# EAGLE board Aux Power Board V1.1 (EAGLE 9.2.2)
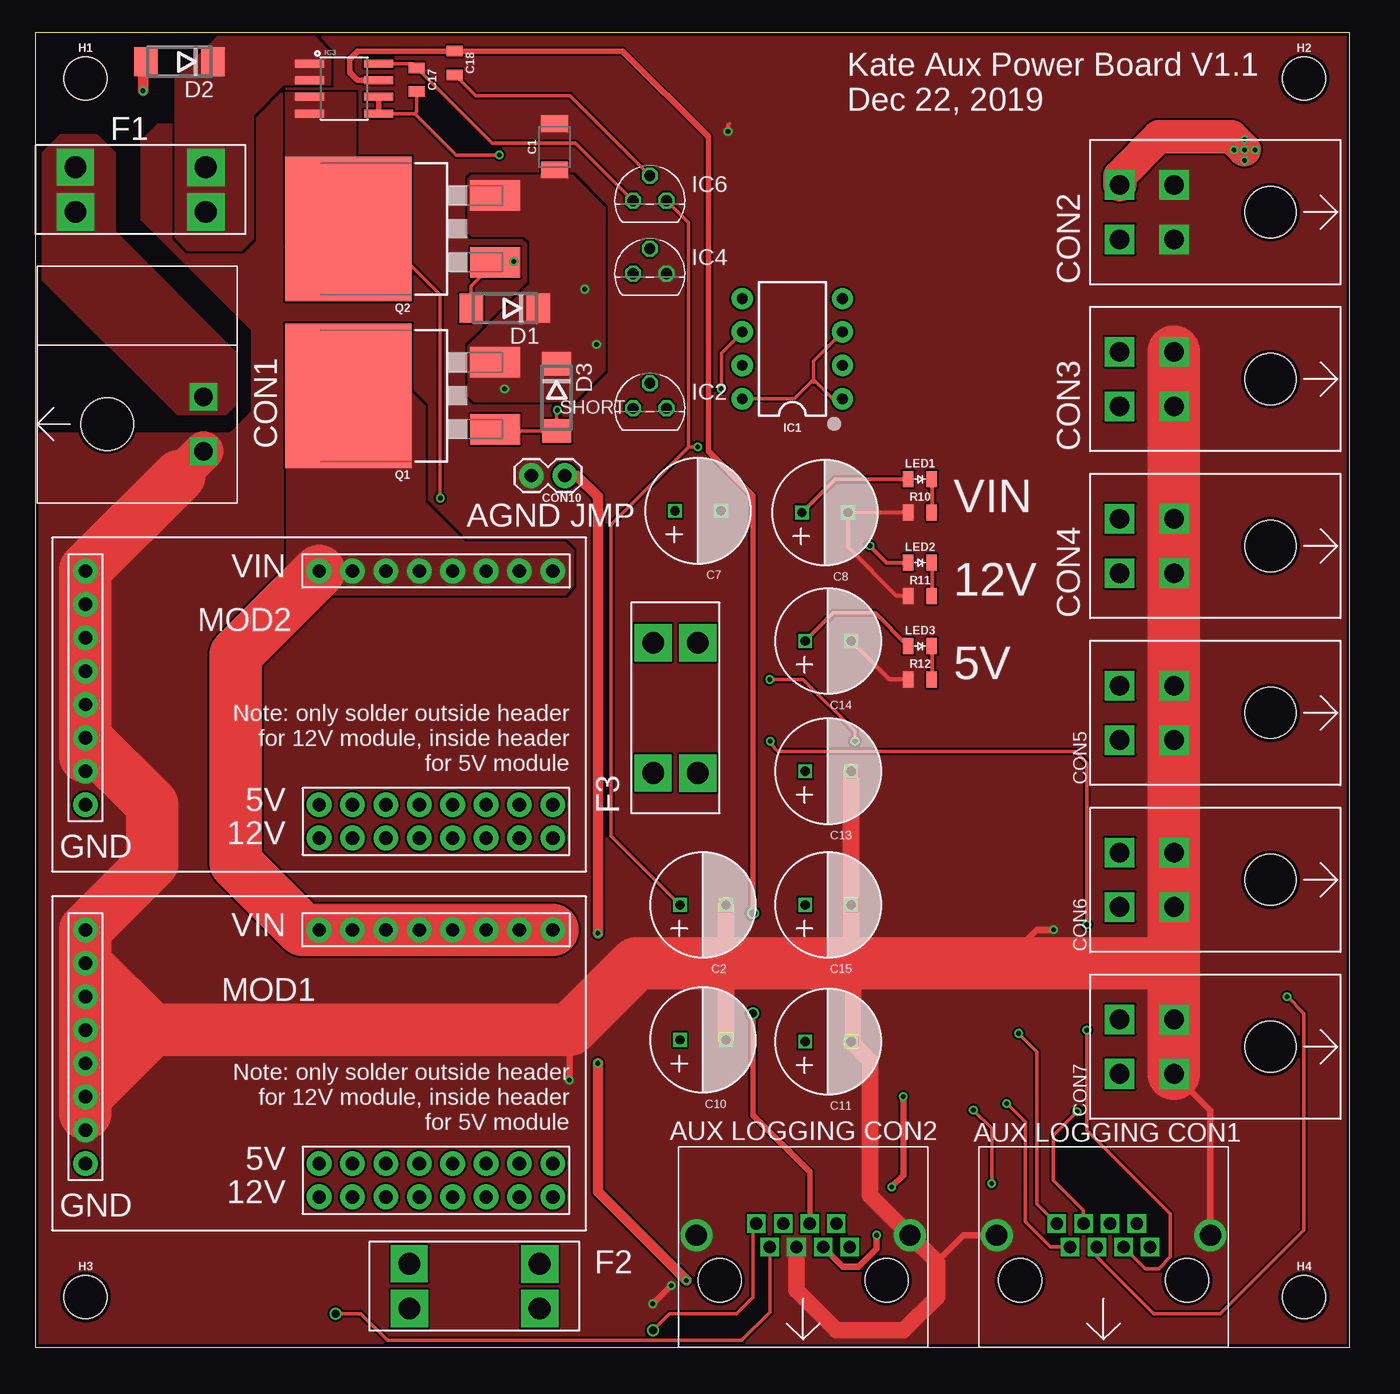
[diagram p0: board, top side]
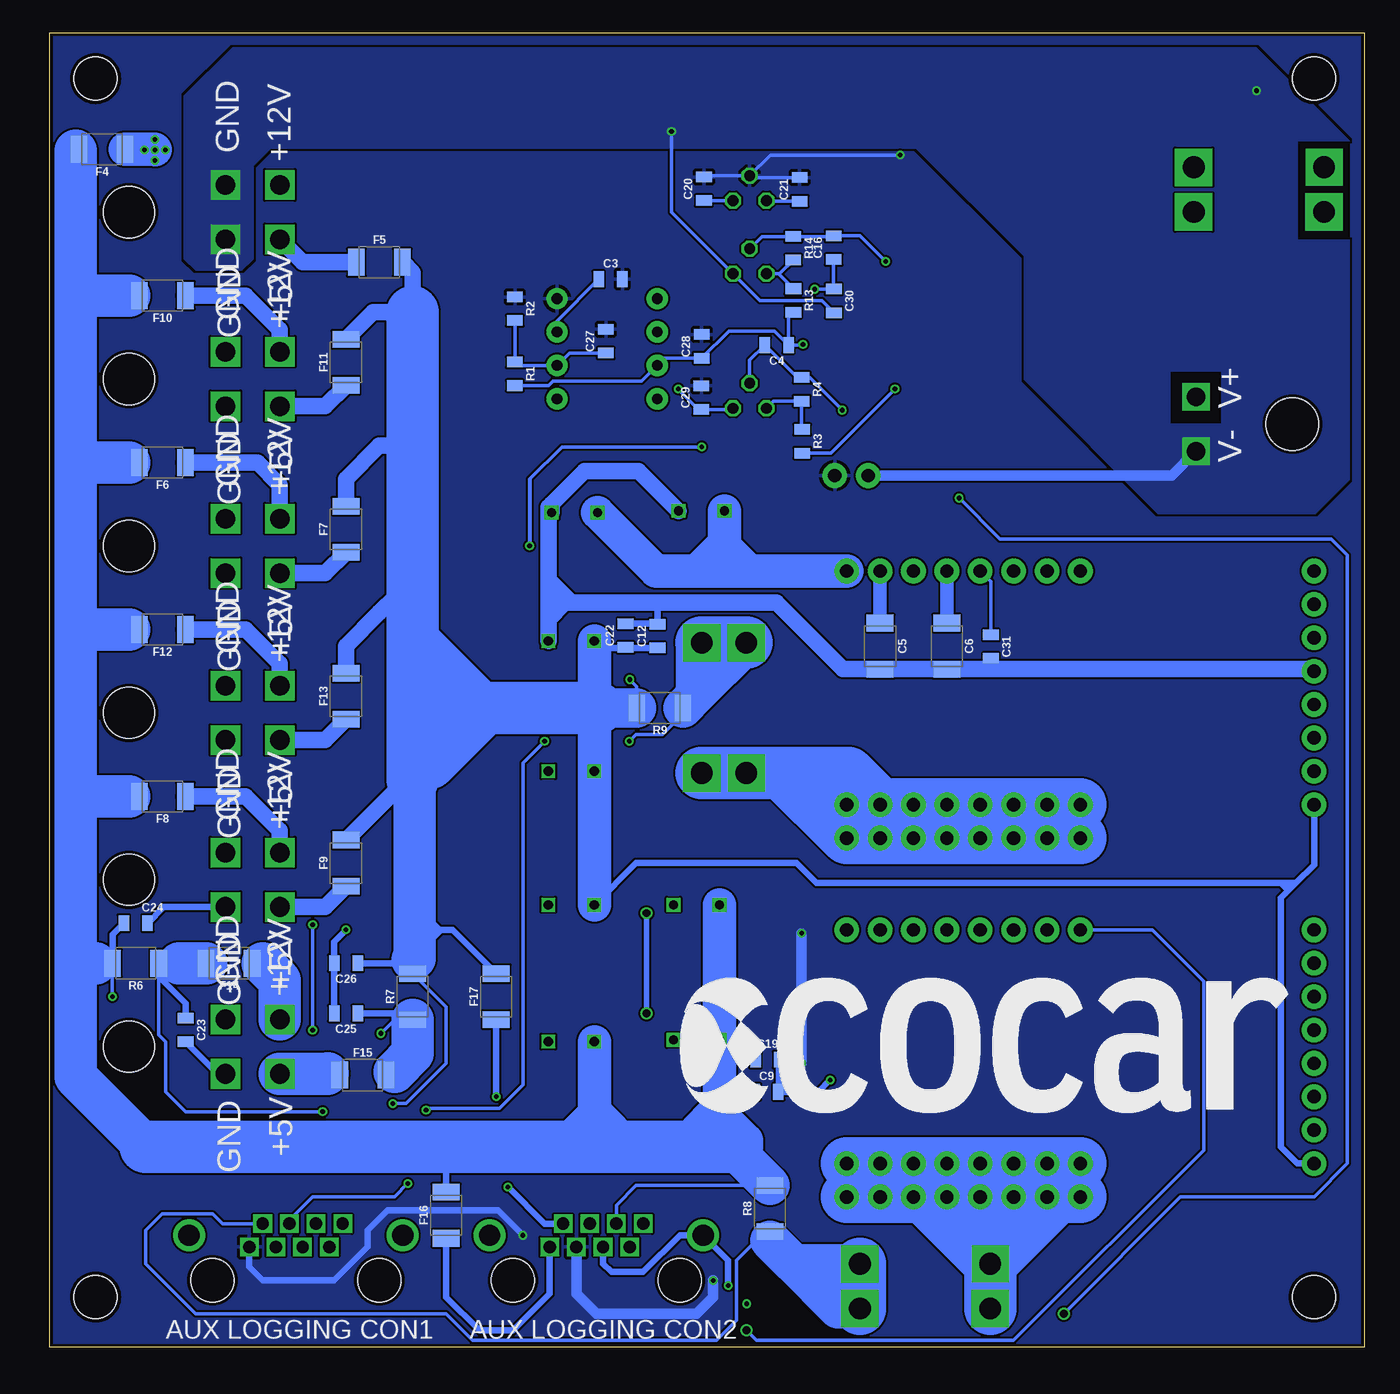
[diagram p1: board, bottom side, seen from below]

Size 100 x 100 mm. Coordinates in mm from the lower left corner, seen from the top.
Outline: 0,0 100,0 100,100 0,100 0,0
Copper layers (1*16): Top 0.035mm / dielectric 1.5mm / Bottom 0.035mm
Design rules "JLCPCB2Layer": minimum track width 6mil, minimum drill 10mil, track to track 6mil, track to pad 6mil, pad to pad 6mil, via to via 6mil, smd to smd 0mil, copper to edge 10mil, drill to drill 10mil, minimum pad ring 6mil, minimum via ring 6mil, stop-mask expansion 2mil, vias tented up to drill 100mil, thermal gap 10mil
bRestrict: area 10.9,70.3 to 14.7,74.2; area 1.1,84.3 to 5,91.7

## Footprints (pad centres in the part's own frame; a part is rotated, then mirrored left to right if it is on the bottom)
1210 = smd 1.27 x 2.06: 1 -1.755,0; 2 1.755,0
CAPACITOR_100UF_50V = drill 0.7 square: + 1.75,0; - -1.75,0
0805 = smd 0.8 x 1.2: 1 -0.9,0; 2 0.9,0
TE_2-PIN = drill 1.4 square: 1 -2.07,12.67; 2 2.07,12.67 | hole 4: 0,5.33
TE_4-PIN = drill 1.5 square: 1 2.07,11.48; 2 -2.07,11.48; 3 2.07,7.34; 4 -2.07,7.34 | hole 3.91: 0,0
RJ45 = drill 0.94 square: 1 9.9,2.54; 2 8.88,4.32; 3 7.87,2.54; 4 6.85,4.32; 5 5.84,2.54; 6 4.82,4.32; 7 3.81,2.54; 8 2.79,4.32 | drill 1.62: 9 -1.78,3.43; 10 14.48,3.43 | hole 3.3: 0,0; 12.7,0
1X02 = drill 1.016 pad 1.88: 1 0,0; 2 2.54,0
DO214AA = smd 1.8 x 2.2: A 2.55,0; C -2.55,0
FUSEHOLDER_VERTICAL = drill 1.65 pad 2.85 square: 1 3.045,1.665; 3 12.965,1.665; 4 12.965,5.065 | drill 1.65 pad 2.8 square: 2 3.045,5.065
STAND-OFF = hole 3.302: 0,0
DIP08 = drill 0.813 pad 1.626: 1 -3.81,-3.81; 2 -1.27,-3.81; 3 1.27,-3.81; 4 3.81,-3.81; 5 3.81,3.81; 6 1.27,3.81; 7 -1.27,3.81; 8 -3.81,3.81
TO92 = drill 0.813 octagon: 1 1.27,0; 2 0,1.905; 3 -1.27,0
SOIC8 = smd 0.61 x 2.21: 1 -1.905,-2.616; 2 -0.635,-2.616; 3 0.635,-2.616; 4 1.905,-2.616; 5 1.905,2.616; 6 0.635,2.616; 7 -0.635,2.616; 8 -1.905,2.616
0805_LED = smd 0.8 x 1.2: 1 -0.9,0; 2 0.9,0
5/12V_MODULE = drill 1.016 pad 1.88: P$1 2.54,2.54; P$2 5.08,2.54; P$3 7.62,2.54; P$4 10.16,2.54; P$5 12.7,2.54; P$6 15.24,2.54; P$7 17.78,2.54; P$8 20.32,2.54; P$9 2.54,20.32; P$10 5.08,20.32; P$11 7.62,20.32; P$12 10.16,20.32; P$13 12.7,20.32; P$14 15.24,20.32; P$15 17.78,20.32; P$16 20.32,20.32; P$17 2.54,22.86; P$18 5.08,22.86; P$19 7.62,22.86; P$20 10.16,22.86; P$21 12.7,22.86; P$22 15.24,22.86; P$23 17.78,22.86; P$24 20.32,22.86; P$25 38.1,2.54; P$26 38.1,5.08; P$27 38.1,7.62; P$28 38.1,10.16; P$29 38.1,12.7; P$30 38.1,15.24; P$31 38.1,17.78; P$32 38.1,20.32
TO-263/D2PAK = smd 2.32 x 3.81: 1 -2.54,-7.045; 3 2.54,-7.045 | smd 11 x 9.65: 2 0,4.125

## Placement (x,y rotation side)
C1  22uF  [1210]  39.5,91.33 90 top
C2  100uF  [CAPACITOR_100UF_50V]  50.8,33.66 180 top
C3  1uF  [0805]  57.34,81.25 0 bottom
C4  1uF  [0805]  44.7,76.24 180 bottom
C5  22uF  [1210]  36.83,53.34 270 bottom
C6  22uF  [1210]  31.75,53.34 270 bottom
C7  100uF  [CAPACITOR_100UF_50V]  50.42,63.63 180 top
C8  100uF  [CAPACITOR_100UF_50V]  60.07,63.5 180 top
C9  22uF  [0805]  45.47,19.43 0 bottom
C10  100uF  [CAPACITOR_100UF_50V]  50.8,23.37 180 top
C11  100uF  [CAPACITOR_100UF_50V]  60.33,23.24 180 top
C12  22uF  [0805]  53.76,54.1 90 bottom
C13  100uF  [CAPACITOR_100UF_50V]  60.33,43.81 180 top
C14  100uF  [CAPACITOR_100UF_50V]  60.33,53.72 180 top
C15  100uF  [CAPACITOR_100UF_50V]  60.33,33.66 180 top
C16  1uF  [0805]  40.36,83.65 90 bottom
C17  0.1uF  [0805]  29.01,96.44 270 top
C18  1nF  [0805]  31.89,97.71 270 top
C19  0.1uF  [0805]  45.41,21.88 0 bottom
C20  0.1uF  [0805]  50.24,88.13 90 bottom
C21  1uF  [0805]  42.95,88.09 90 bottom
C22  0.1uF  [0805]  56.19,54.15 90 bottom
C23  0.1uF  [0805]  89.66,24.13 270 bottom
C24  0.1uF  [0805]  93.47,32.26 0 bottom
C25  0.1uF  [0805]  77.47,25.4 180 bottom
C26  0.1uF  [0805]  77.47,29.21 180 bottom
C27  0.1uF  [0805]  57.7,76.54 90 bottom
C28  0.1uF  [0805]  50.4,76.14 90 bottom
C29  0.1uF  [0805]  50.44,72.25 90 bottom
C30  0.1uF  [0805]  40.35,79.61 270 bottom
C31  0.1uF  [0805]  28.4,53.3 270 bottom
CON1  TE_2-PIN  [TE_2-PIN]  0.13,70.23 270 top
CON2  TE_4-PIN  [TE_4-PIN]  93.98,86.36 90 top
CON3  TE_4-PIN  [TE_4-PIN]  93.98,73.66 90 top
CON4  TE_4-PIN  [TE_4-PIN]  93.98,60.96 90 top
CON5  TE_4-PIN  [TE_4-PIN]  93.98,48.26 90 top
CON6  TE_4-PIN  [TE_4-PIN]  93.98,35.56 90 top
CON7  TE_4-PIN  [TE_4-PIN]  93.98,22.86 90 top
CON8  RJ45  [RJ45]  74.93,5.08 0 top
CON9  RJ45  [RJ45]  52.07,5.08 0 top
CON10  1X02  [1X02]  40.28,66.32 180 top
D1  [DO214AA]  35.72,79.04 180 top
D2  [DO214AA]  10.96,97.8 180 top
D3  [DO214AA]  39.66,72.26 270 top
F1  7.5A  [FUSEHOLDER_VERTICAL]  0,84.71 0 top
F2  7.5A  [FUSEHOLDER_VERTICAL]  25.4,1.27 0 top
F3  7.5A  [FUSEHOLDER_VERTICAL]  52.07,40.64 90 top
F4  [1210]  96.04,91.14 180 bottom
F5  [1210]  74.93,82.55 0 bottom
F6  [1210]  91.44,67.31 180 bottom
F7  [1210]  77.47,62.23 90 bottom
F8  [1210]  91.44,41.91 180 bottom
F9  [1210]  77.47,36.83 90 bottom
F10  [1210]  91.44,80.01 180 bottom
F11  [1210]  77.47,74.93 90 bottom
F12  [1210]  91.44,54.61 180 bottom
F13  [1210]  77.47,49.53 90 bottom
F14  [1210]  86.36,29.21 180 bottom
F15  [1210]  76.2,20.7 0 bottom
F16  [1210]  69.85,10.03 90 bottom
F17  [1210]  66.04,26.67 90 bottom
H1  STAND-OFF  [STAND-OFF]  3.81,96.52 0 top
H2  STAND-OFF  [STAND-OFF]  96.52,96.52 0 top
H3  STAND-OFF  [STAND-OFF]  3.81,3.81 0 top
H4  STAND-OFF  [STAND-OFF]  96.52,3.81 0 top
IC1  OP-AMP_LM10  [DIP08]  57.6,75.97 90 top
IC2  LINEAR-REGULATOR_LM337L  [TO92]  46.75,71.44 0 top
IC3  CURRENT-SENSOR_ACS723  [SOIC8]  23.5,95.76 270 top
IC4  LINEAR-REGULATOR_LM337L  [TO92]  46.75,81.68 0 top
IC6  LINEAR-REGULATOR_LP2950  [TO92]  46.75,87.23 0 top
LED1  [0805_LED]  67.31,66.04 0 top
LED2  [0805_LED]  67.31,59.69 0 top
LED3  [0805_LED]  67.31,53.34 0 top
MOD1  12V_MODULE  [5/12V_MODULE]  41.91,34.29 180 top
MOD2  5V_MODULE  [5/12V_MODULE]  41.91,61.59 180 top
Q1  [TO-263/D2PAK]  27.94,72.39 90 top
Q2  [TO-263/D2PAK]  27.94,85.09 90 top
R1  100k  [0805]  64.62,74.06 270 bottom
R2  1.3k  [0805]  64.62,79.01 270 bottom
R3  1.6k  [0805]  42.76,68.92 270 bottom
R4  240  [0805]  42.8,72.87 270 bottom
R6  [1210]  93.47,29.21 180 bottom
R7  [1210]  72.39,26.67 90 bottom
R8  [1210]  45.21,10.54 90 bottom
R9  [1210]  53.59,48.64 180 bottom
R10  [0805]  67.31,63.5 0 top
R11  [0805]  67.31,57.15 0 top
R12  [0805]  67.31,50.8 0 top
R13  1.6k  [0805]  43.43,79.64 270 bottom
R14  240  [0805]  43.44,83.61 270 bottom
U$7  ECOCAR_LOGO  [ECOCAR_LOGO_2018]  52.07,17.78 0 bottom

## Library data of the parts
C1-C31 R1-R4 R6-R14 = EcoCar-Passives
CON1-CON9 = EcoCar-Connectors
CON10 = EcoCar-Connectors-2.54mm
D1-D3 F1-F17 = EcoCar-Fuses-Protection
H1-H4 U$7 = EcoCar-Miscellaneous
IC1-IC4 IC6 = EcoCar-Integrated-Circuits
LED1-LED3 Q1 Q2 = EcoCar-Discrete-Semiconductors
MOD1 MOD2 = EcoCar-Modules

## Nets
5V: C12.1 C13.+ C14.+ C15.+ C22.1 C26.1 CON8.4 CON8.7 F5.2 F7.2 F9.2 F11.2 F13.2 F17.2 LED3.1 MOD1.P$32 MOD2.P$32 R7.2 R9.2
5V': CON8.3 F3.3 F3.4 R9.1
5V_ANALOG: C17.1 C21.1 IC3.8 IC6.3
5V_FC: C25.1 CON8.8 F15.2 R7.1
12V: C2.+ C9.1 C10.+ C11.+ C19.1 C20.1 C24.1 CON8.5 CON9.6 F4.2 F6.2 F8.2 F10.2 F12.2 F16.2 IC6.1 LED2.1 R6.2 R8.2
12V': CON8.2 F2.3 F2.4 R8.1
12V_FC: C23.1 CON8.6 F14.2 R6.1
AGND: C3.2 C17.2 C18.2 C20.2 C21.2 C27.2 C28.2 C29.2 CON8.1 CON9.3 CON10.1 IC1.4 IC3.5 IC3.6 IC6.2 R2.1
BATTERY_IN: CON9.7 IC3.3 IC3.4 Q2.2
GND: C1.2 C2.- C5.2 C6.2 C7.- C8.- C9.2 C10.- C11.- C12.2 C13.- C14.- C15.- C19.2 C22.2 C23.2 C24.2 C25.2 C26.2 C30.2 C31.2 CON1.2 CON2.3 CON2.4 CON3.3 CON3.4 CON4.3 CON4.4 CON5.3 CON5.4 CON6.3 CON6.4 CON7.3 CON7.4 CON8.9 CON8.10 CON9.5 CON9.9 CON9.10 CON10.2 D2.A IC4.1 MOD1.P$25 MOD1.P$26 MOD1.P$27 MOD1.P$28 MOD1.P$29 MOD1.P$30 MOD1.P$31 MOD2.P$25 MOD2.P$26 MOD2.P$27 MOD2.P$28 MOD2.P$29 MOD2.P$30 MOD2.P$31 R10.1 R11.1 R12.1
HALL_CURRENT: C18.1 CON9.4 IC3.7
N$1: CON2.1 F4.1
N$2: CON1.1 F1.1 F1.2
N$4: LED1.2 R10.2
N$5: C3.1 IC1.1 IC1.3 IC1.8
N$6: C27.1 IC1.2 R1.1 R2.2
N$7: F2.1 F2.2 MOD1.P$9 MOD1.P$10 MOD1.P$11 MOD1.P$12 MOD1.P$13 MOD1.P$14 MOD1.P$15 MOD1.P$16 MOD1.P$17 MOD1.P$18 MOD1.P$19 MOD1.P$20 MOD1.P$21 MOD1.P$22 MOD1.P$23 MOD1.P$24
N$8: C4.2 D3.A IC2.2 Q1.1 R4.1
N$9: IC2.3 R3.1 R4.2
N$10: CON2.2 F5.1
N$11: F3.1 F3.2 MOD2.P$9 MOD2.P$10 MOD2.P$11 MOD2.P$12 MOD2.P$13 MOD2.P$14 MOD2.P$15 MOD2.P$16 MOD2.P$17 MOD2.P$18 MOD2.P$19 MOD2.P$20 MOD2.P$21 MOD2.P$22 MOD2.P$23 MOD2.P$24
N$12: CON9.1 F16.1
N$13: LED3.2 R12.2
N$14: CON9.2 F17.1
N$15: CON3.2 F11.1
N$16: CON3.1 F10.1
N$17: LED2.2 R11.2
N$18: IC4.3 R13.1 R14.2
N$19: CON5.2 F13.1
N$20: CON5.1 F12.1
N$21: C16.2 D1.A IC4.2 Q2.1 R14.1
N$22: D2.C F1.3 F1.4 IC3.1 IC3.2
N$23: CON4.2 F7.1
N$24: CON4.1 F6.1
N$27: CON6.2 F9.1
N$28: CON6.1 F8.1
N$31: CON7.2 F15.1
N$32: CON7.1 F14.1
REGULATOR_ON: C29.1 IC1.6 IC2.1
REVERSE_POLARITY_PROT_OUT: C1.1 C4.1 C16.1 C28.1 C30.1 D1.C D3.C IC1.7 Q1.3 Q2.3 R1.2 R3.2 R13.2
VCC: C5.1 C6.1 C7.+ C8.+ C31.1 CON9.8 LED1.1 MOD1.P$1 MOD1.P$2 MOD1.P$3 MOD1.P$4 MOD1.P$5 MOD1.P$6 MOD1.P$7 MOD1.P$8 MOD2.P$1 MOD2.P$2 MOD2.P$3 MOD2.P$4 MOD2.P$5 MOD2.P$6 MOD2.P$7 MOD2.P$8 Q1.2

## Tracks (layer width: path | path; a pad name or v marks a point on that pad's centre or on a via)
5V  (via drill 0.35)
  Top 0.254: v73.91,18.54 75.31,17.14 75.31,9.53 77.22,7.62 CON8.7 | v55.88,50.8 58.42,50.8 62.36,46.86 v62.36,46.1 | v71.37,18.03 72.77,16.64 v72.77,12.45
  Top 0.305: C14.+ 60.73,55.88 63.87,55.88 LED3.1
  Bottom 0.254: 55.88,48.11 R9.2 55.35,50.27 v55.88,50.8 | R7.2 69.85,25.89 69.85,21.59 72.9,18.54 v73.91,18.54 | v62.36,46.1 64.01,44.45 64.01,19.94 65.79,18.16 71.25,18.16 v71.37,18.03 | v72.77,12.45 73.79,11.43 80.01,11.43 81.78,9.66 CON8.4 | C22.1 58.1,53.25 C14.+
  Bottom 0.508: 66.53,28.43 F17.2 69.36,31.75 70.36,31.75 | 70.36,31.75 71.12,31.75 71.12,33.02 | 72.26,33.02 71.63,33.02 70.36,31.75 | 70.36,31.75 70.36,31.62 70.87,31.11 | C26.1 73.17,29.21 R7.2 | C15.+ 55.4,36.83 43.18,36.83 41.66,35.31 6.35,35.31 | 6.35,35.31 6.1,35.31 | 6.1,35.31 5.21,35.31 | 5.21,35.31 3.81,36.7 MOD2.P$32 | 5.21,35.31 5.65,34.86 | 5.65,34.86 6.35,34.16 6.35,15.24 5.08,13.97 MOD1.P$32 | 5.65,34.86 5.71,34.92 | 5.71,34.92 6.1,35.31 | 5.71,34.92 5.97,34.92 6.35,35.31 | C12.1 58.06,53.2 C14.+ | 74.93,55.88 72.39,58.42 72.39,68.58 74.93,68.58
  Bottom 1.27: F5.2 72.39,81.77 72.39,78.74 75.42,78.74 F11.2 | F7.2 77.47,66.04 74.93,68.58 73.66,68.58 | F13.2 77.47,53.34 74.93,55.88 73.66,57.15 | F9.2 72.88,43.18 72.39,43.18 | 72.26,36.83 72.39,36.7 72.39,29.46 R7.2
  Bottom 2.54: C14.+ 58.58,48.92 58.29,48.64 58.58,48.36 C13.+ C15.+
  Bottom 3: R9.2 58.29,48.64
  Bottom 3.25: 71.12,44.45 72.26,43.31 72.26,36.83 72.26,33.02 72.26,29.59 72.39,29.46
  Bottom 4: 58.29,48.64 67.31,48.64 | 67.31,48.64 71.75,48.64 72.39,49.28 | 72.39,49.28 72.39,53.34 | 72.39,53.34 72.39,68.58 72.39,78.74 | 72.39,49.28 72.39,43.18 | 67.31,48.64 67.31,48.26 71.12,44.45 | 67.31,48.64 72.01,53.34 72.39,53.34
5V'  (via drill 0.35)
  Top 0.254: v80.01,32.13 80.01,44.45 79.12,45.34 56.52,45.34 55.9,45.95 v55.9,46.1 | v80.01,24.13 80.01,16.51 86.36,10.16 86.36,6.86 85.47,5.97 84.45,5.97 CON8.3
  Bottom 0.254: v80.01,32.13 v80.01,24.13 | v55.9,46.1 55.4,46.6 53.4,46.6 51.84,48.16 R9.1
  Bottom 3: F3.4 47.01,53.48 50.88,49.6 | 50.88,49.6 R9.1 | F3.3 50.88,53.13 50.88,49.6
  Bottom 4: F3.3 F3.4
5V_ANALOG
  Top 0.254: IC6.3 41.11,91.6 34.75,91.6 C17.1 28.69,97.66 IC3.8
  Bottom 0.254: IC6.3 45.44,87.19 C21.1
5V_FC  (via drill 0.35)
  Top 0.254: v74.8,23.88 76.2,22.48 76.2,10.92 CON8.8
  Bottom 0.254: R7.1 73.76,24.91 v74.8,23.88
  Bottom 0.508: C25.1 72.39,25.4 R7.1 | F15.2 74.04,20.7 73.79,20.95
  Bottom 3.25: R7.1 72.39,22.35 73.79,20.95
12V  (via drill 0.35)
  Top 0.254: v95.25,26.67 96.52,25.4 96.52,8.89 90.17,2.54 85.09,2.54 80.77,6.86 CON8.5 | IC6.1 49.7,85.55 49.7,68.5 | 49.7,68.5 43.8,62.6 43.8,38.91 C2.+ | 49.7,68.5 v50.4,68.5
  Top 0.305: v63.5,60.96 64.77,59.69 LED2.1
  Bottom 0.254: R8.2 55.4,12.3 56.9,10.79 CON9.6 | R6.2 95.25,29.19 v95.25,26.67 | C20.1 IC6.1 | v50.4,68.5 61.04,68.5 63.5,66.04 | F4.2 97.92,91.02 98.04,91.02
  Bottom 0.305: 63.5,66.04 v63.5,60.96
  Bottom 0.508: F16.2 69.85,15.24 | 48.67,19.43 49.05,19.05 | C24.1 95.23,31.4 R6.2 | 93.98,80.01 F10.2 | 93.98,67.31 F6.2 | 93.98,54.61 F12.2 | 93.98,41.91 F8.2 | 98.04,29.21 98.02,29.19 95.25,29.19
  Bottom 0.813: C9.1 48.67,19.43 | C19.1 49.03,21.88 49.05,21.9 | F4.2 97.75,91.1 97.1,91.1
  Bottom 2.54: C2.+ C10.+ 49.05,21.9 49.05,19.05 49.05,17.78 | 49.05,17.78 49.05,16.13 48.16,15.24 | 49.05,17.78 49.53,17.78 50.8,16.51 | 49.05,17.78 46.99,15.72 46.99,15.24 | C11.+ 58.58,17.78 | 58.58,17.78 58.58,15.39 58.42,15.24 | 58.58,17.78 58.42,17.78 55.88,15.24 | 58.58,17.78 60.96,15.39 60.96,15.24
  Bottom 3: R8.2 48.16,15.24
  Bottom 3.25: 92.71,15.24 98.04,20.57 98.04,29.21 | 98.04,41.91 98.04,29.21 | 98.04,41.91 98.04,54.61 | 98.04,54.61 98.04,67.31 | 98.04,67.31 98.04,80.01 | 98.04,91.02 98.04,80.01 | 98.04,80.01 93.98,80.01 | 98.04,67.31 93.98,67.31 | 98.04,54.61 93.98,54.61 | 98.04,41.91 93.98,41.91 | 96.52,29.21 98.04,29.21
  Bottom 4: 48.16,15.24 55.88,15.24 58.42,15.24 60.96,15.24 69.85,15.24 92.71,15.24
12V'
  Bottom 0.254: CON8.2 86.87,9.4 87.63,10.16 91.44,10.16 92.71,8.89 92.71,6.35 88.9,2.54 69.85,2.54 67.82,0.51 49.28,0.51 47.75,2.03 47.75,6.6 46.23,8.13 45.21,8.13
  Bottom 0.508: 43.42,6.33 45.1,6.33 | 45.21,8.13 R8.1
  Bottom 3: F2.4 43.42,6.33 | 43.42,6.33 45.21,8.13 | F2.3 40.02,2.94 43.42,6.33
  Bottom 4: F2.4 F2.3
12V_FC  (via drill 0.35)
  Top 0.254: v79.25,17.91 77.47,16.13 77.47,12.7 79.75,10.42 CON8.6
  Bottom 0.254: R6.1 91.72,23.77 91.19,23.24 91.19,19.43 89.66,17.91 v79.25,17.91
  Bottom 0.508: C23.1 89.66,26.16 91.72,28.22 R6.1 90.17,29.21
  Bottom 3.25: F14.2 90.17,29.21
AGND  (via drill 0.35)
  Top 0.254: v35.3,90.7 32,90.7 28.85,93.85 | 28.85,93.85 IC3.5 | 28.85,93.85 29.01,94.02 C17.2 | C18.2 33.5,95.2 40.69,95.2 IC6.2
  Top 0.406: IC3.6 IC3.5
  Top 0.508: CON9.3 61.46,6.1 62.61,6.1 64.01,7.49 v64.01,8.51
  Top 0.813: v42.8,21.59 42.8,11.81 v49.53,5.08 | v42.8,31.5 42.8,64.7 41.18,66.32 CON10.1
  Bottom 0.254: IC6.2 46.6,88.99 C21.2 | C20.2 50.13,89.14 IC6.2 | IC6.2 45.19,90.7 v35.3,90.7
  Bottom 0.508: v64.01,8.51 65.91,10.41 74.3,10.41 75.82,8.89 75.82,7.62 78.36,5.08 83.82,5.08 84.84,6.1 CON8.1
  Bottom 0.813: v42.8,31.5 v42.8,21.59 | v49.53,5.08 49.53,3.81 50.8,2.54 58.42,2.54 59.94,4.06 CON9.3
  pour Bottom (rank 6): -3.81,104.14 104.14,104.14 104.14,-3.81 -3.81,-3.81
BATTERY_IN  (via drill 0.35, 0.6)
  Top 0.254: v22.86,2.54 24.77,2.54 26.8,0.51 53.72,0.51 55.88,2.67 CON9.7 | Q2.2 25.81,85.09 30.8,80.1 v30.8,64.6
  Bottom 0.254: v22.86,2.54 13.97,11.43 3.81,11.43 1.27,13.97 1.27,60.27 2.5,61.5 27.7,61.5 v30.8,64.6
  pour Top (no thermals): 19,95.5 24.4,95.5 24.4,84.2 19,84.2
GND  (via drill 0.35)
  Top 0.254: v52.7,92.5 52.7,93 52.8,93.1
  Top 0.305: R11.1 65.53,57.15 61.85,60.83 61.85,63.47 | 61.85,63.47 C8.- | R10.1 61.88,63.5 61.85,63.47 | R12.1 65,50.8 C14.-
  Top 0.508: 68.58,6.48 70.61,8.51 CON8.9 | CON7.4 89.41,18.02 CON8.10 | v46.99,3.3 v48.39,4.7 | v40.64,20.32 40.64,24.13 | v77.47,31.75 76.2,31.75 74.93,30.48 74.93,29.21 | MOD2.P$31 MOD2.P$30
  Top 0.813: D2.A 8.2,97.59 v8.2,95.6
  Top 1.27: MOD1.P$30 MOD1.P$31 | C13.- C15.- 62.08,29.36 62.23,29.21 62.23,23.4 C11.- 63.5,21.82 63.5,11.56 CON9.10 68.58,6.48 68.58,3.81 66.04,1.27 60.96,1.27 57.91,4.32 CON9.5 | C2.- 52.55,29.69 | 52.55,29.69 52.07,29.21 | 52.55,29.69 C10.-
  Top 3: CON1.2 10.93,66.29 10.92,66.29
  Top 4: 10.93,66.29 3.81,59.17 MOD2.P$25 MOD2.P$26 MOD2.P$27 MOD2.P$28 MOD2.P$29 MOD2.P$30 | MOD2.P$30 3.81,44.96 | MOD2.P$30 8.89,41.27 8.89,36.83 MOD1.P$25 MOD1.P$26 | MOD1.P$26 MOD1.P$27 MOD1.P$28 | MOD1.P$28 MOD1.P$29 3.81,17.78 | CON3.3 CON3.4 CON4.3 CON4.4 CON5.3 CON5.4 CON6.3 CON6.4 86.64,29.21 | 86.64,29.21 CON7.3 CON7.4 | 86.64,29.21 74.93,29.21 62.23,29.21 52.07,29.21 45.72,29.21 40.64,24.13 8.89,24.13 | 8.89,24.13 MOD1.P$28 | MOD1.P$26 8.89,24.13 | MOD1.P$30 8.89,24.13
  Bottom 0.254: C31.2 28.4,51.59 | C30.2 41.27,79.63 45.97,79.63 IC4.1 52.7,86.36 v52.7,92.5
  Bottom 0.508: 53.76,56.64 C12.2 53.81,55.05 C22.2 | C24.2 91.34,33.49 CON6.4 | C23.2 87.22,20.79 CON7.4 | v48.39,4.7 48.39,6.61 CON9.9 52.07,8.51 54.86,5.71 57.28,5.71 57.91,6.35 CON9.5 | v40.64,20.32 41.53,19.43 C9.2 44.51,19.49 C19.2 | C25.2 C26.2 78.37,30.85 v77.47,31.75
  Bottom 0.813: CON1.2 14.64,66.32 CON10.2
  Bottom 1.27: C7.- 55.22,66.67 59.31,66.67 61.82,64.16 | 61.82,64.16 C8.- 62.08,63.25 | 62.08,63.25 62.08,58.42 | 62.08,58.42 62.08,55.37 | 62.08,55.37 C14.- | 61.82,64.16 62.08,63.91 62.08,63.25 | 62.08,58.42 60.3,56.64 | 60.3,56.64 53.76,56.64 44.7,56.64 39.65,51.59 C5.2 C6.2 28.4,51.59 3.96,51.59 MOD2.P$28 | 60.3,56.64 60.8,56.64 62.08,55.37
  pour Bottom (rank 5, no thermals): 85.4,81.9 88.9,81.9 89.8,82.8 89.8,95.2 86.1,98.9 8.2,98.9 1.1,91.8 1.1,66 3.7,63.4 15.7,63.4 25.9,73.6 25.9,83 34.1,91.2 83.2,91.2 84.5,89.9 84.5,82.8
  pour Top (rank 6, no thermals): 16.7,103 16.7,97.2 12.5,93 9.3,93 8.1,91.8 8.1,85.8 16.5,77.4 16.5,71.2 14.9,69.6 14.8,69.5 -1.8,69.5 -1.8,-2.6 102.7,-2.6 102.7,103
HALL_CURRENT  (via drill 0.6)
  Top 0.406: CON9.4 58.93,13.34 54.61,17.65 v54.61,25.4 | v54.61,33.02 54.61,64.77 51.2,68.18 51.2,92.1 44.69,98.61 C18.1 24.51,98.61 23.9,98 23.9,97 24.51,96.39 IC3.7
  Bottom 0.406: v54.61,33.02 v54.61,25.4
N$1  (via drill 0.35)
  Top 0.203: v92,91.9 v92,91.1 v92.8,91.1
  Top 2.54: CON2.1 82.5,89.1 85.5,92.1 91,92.1 v92,91.1
  Bottom 0.254: v92,90.3 92.04,90.34 92.04,91.14 | v92,91.1 v91.2,91.1
  Bottom 2.54: F4.1 92.04,91.14 v92,91.1
N$2
  pour Top (no thermals): 10.8,70.9 14.5,70.9 15.4,71.8 15.4,75.6 6.1,84.9 6.1,90.9 4.7,92.3 1.9,92.3 0.5,90.9 0.5,81.2
N$4
  Top 0.305: LED1.2 R10.2
N$5
  Top 0.254: IC1.3 59.2,75.03 59.2,73.6 | 59.2,73.6 59.35,73.45 | 59.35,73.45 60.64,72.16 IC1.1 | 59.2,73.6 59.03,73.43 | 59.03,73.43 57.76,72.16 IC1.8 | 59.03,73.43 59.33,73.43 59.35,73.45
  Bottom 0.254: C3.1 61.41,78.08 IC1.3
N$6
  Bottom 0.254: R2.2 R1.1 64.36,74.7 IC1.2 60.47,75.64 C27.1
N$7
  Bottom 1.27: MOD1.P$20 MOD1.P$19 | MOD1.P$21 MOD1.P$13 MOD1.P$14 | MOD1.P$23 MOD1.P$22 | MOD1.P$11 MOD1.P$10
  Bottom 2.54: MOD1.P$23 MOD1.P$15 | MOD1.P$10 MOD1.P$18
  Bottom 4: MOD1.P$16 MOD1.P$15 MOD1.P$13 MOD1.P$12 MOD1.P$10 MOD1.P$9 | MOD1.P$21 MOD1.P$22 MOD1.P$24 23.35,11.43 F2.2 | MOD1.P$21 MOD1.P$19 | MOD1.P$19 MOD1.P$18 MOD1.P$17 | MOD1.P$21 28.45,10.66 F2.2 | F2.2 F2.1 | F2.2 33.54,11.43 MOD1.P$19
N$8  (via drill 0.35)
  Top 0.254: v39.7,71.3 39.66,71.26 D3.A 35.12,69.71 Q1.1
  Bottom 0.254: v39.7,71.3 42.17,73.77 R4.1 43.13,73.77 C4.2 46.75,75.09 IC2.2
N$9
  Bottom 0.254: IC2.3 44.95,71.97 R4.2 42.8,69.86 R3.1
N$10
  Bottom 1.27: CON2.2 80.76,82.55 F5.1
N$11
  Bottom 2.54: MOD2.P$9 MOD2.P$17 | MOD2.P$18 MOD2.P$10 | MOD2.P$11 MOD2.P$19 | MOD2.P$12 MOD2.P$20 | MOD2.P$21 MOD2.P$13 | MOD2.P$22 MOD2.P$14 MOD2.P$15 | MOD2.P$15 MOD2.P$23 | MOD2.P$15 MOD2.P$16 MOD2.P$24
  Bottom 4: MOD2.P$16 MOD2.P$14 MOD2.P$13 MOD2.P$12 MOD2.P$11 MOD2.P$10 | MOD2.P$9 MOD2.P$10 | MOD2.P$24 MOD2.P$23 MOD2.P$22 MOD2.P$21 MOD2.P$20 MOD2.P$19 MOD2.P$18 MOD2.P$17 44.32,43.69 F3.2 | MOD2.P$10 39.24,43.69 F3.2 | F3.2 F3.1
N$12
  Bottom 0.508: CON9.1 61.97,4.07 64.77,1.27 67.31,1.27 69.85,3.81 F16.1
N$13
  Top 0.305: LED3.2 R12.2
N$14  (via drill 0.35)
  Top 0.508: v65.15,12.19 66.04,13.08 v66.04,19.05
  Bottom 0.508: F17.1 v66.04,19.05 | v65.15,12.19 62.36,9.4 CON9.2
N$15
  Bottom 1.27: F11.1 79.06,71.59 CON3.2
N$16
  Bottom 1.27: F10.1 85.09,80.01 82.5,77.42 CON3.1
N$17
  Top 0.305: LED2.2 R11.2
N$18
  Bottom 0.254: R14.2 44.47,81.68 IC4.3 44.57,81.68 R13.1
N$19
  Bottom 1.27: F13.1 79.06,46.19 CON5.2
N$20
  Bottom 1.27: F12.1 85.09,54.61 82.5,52.02 CON5.1
N$21  (via drill 0.35)
  Top 0.254: v36.4,82.6 36.35,82.55 Q2.1 33.17,80.73 D1.A
  Bottom 0.254: IC4.2 45.83,84.51 R14.1 40.4,84.51 C16.2 38.35,84.55 v36.4,82.6
N$22
  pour Top (no thermals): 22.5,96 22.5,98.5 21.2,99.8 13.9,99.8 10.6,96.5 10.6,84.4 11.6,83.4 15.7,83.4 16.6,84.3 16.6,93.7 18.9,96
N$23
  Bottom 1.27: F7.1 79.06,58.89 CON4.2
N$24
  Bottom 1.27: F6.1 84.2,67.31 82.5,65.61 CON4.1
N$27
  Bottom 1.27: F9.1 79.06,33.49 CON6.2
N$28
  Bottom 1.27: F8.1 85.09,41.91 82.5,39.32 CON6.1
N$31
  Bottom 1.27: F15.1 78.04,20.79 78.91,20.79
  Bottom 3.25: CON7.2 78.91,20.79 78.87,20.83
N$32
  Bottom 0.508: 83.82,29.21 F14.1
  Bottom 3.25: CON7.1 82.5,27.89 83.82,29.21
REGULATOR_ON  (via drill 0.35)
  Top 0.254: v52.2,72.9 52.2,75.65 IC1.6
  Bottom 0.254: IC2.1 48.11,71.35 C29.1 50.65,71.35 v52.2,72.9
REVERSE_POLARITY_PROT_OUT  (via drill 0.35)
  Bottom 0.254: R1.2 62.04,73.16 61.7,73.5 54.99,73.5 IC1.7 53.25,75.24 C28.1 48.34,77.3 44.86,77.3 C4.1 | C16.1 C30.1 v41.79,80.51 v41.8,80.5 | R13.2 43.8,78.37 C4.1 | C4.1 42.76,76.24 v42.7,76.3 | R3.2 40.58,68.02 v35.7,72.9
  pour Top (no thermals): 36.9,84.5 33.2,84.5 32.9,84.8 32.9,88.9 33.2,89.2 40.9,89.2 43.4,86.7 43.4,74.3 41,71.9 33.4,71.9 32.9,72.4 32.9,76.2 33.9,77.2 37.6,80.9 37.6,84.1 37.2,84.5
VCC  (via drill 0.6)
  Top 0.254: v46.99,1.27 48.26,2.54 53.34,2.54 54.61,3.81 54.61,9.15 CON9.8
  Top 0.305: C8.+ 60.86,66.04 LED1.1
  Top 2.54: MOD1.P$7 20.32,31.75
  Top 4: MOD2.P$8 15.24,52.7 15.24,36.83 20.32,31.75 MOD1.P$8 MOD1.P$7 MOD1.P$6 MOD1.P$5 MOD1.P$4 MOD1.P$3 MOD1.P$2 MOD1.P$1
  Bottom 0.254: v46.99,1.27 46.23,0.51 26.67,0.51 12.19,14.99 12.19,27.81 16.13,31.75 MOD1.P$8 | C31.1 28.4,58.24 MOD2.P$5
  Bottom 1.016: C6.1 MOD2.P$4 | C5.1 MOD2.P$2
  Bottom 2.54: MOD2.P$1 46.76,59.05 | 46.76,59.05 48.26,59.05 | 48.26,59.05 50.8,59.05 | 50.8,59.05 53.88,59.05 C8.+ | C7.+ 48.67,60.96 | 48.67,60.96 48.67,59.46 48.26,59.05 | 48.67,60.96 46.76,59.05 | 48.67,60.96 48.9,60.96 50.8,59.05
  pour Top (no thermals): 19.1,73 28.3,73 29.7,71.6 29.7,64.3 32.7,61.3 40.3,61.3 41,60.6 41,57.9 40.3,57.2 20.6,57.2 19.1,58.7

## Text on the board
tPlace: Kate Aux Power Board V1.1 / Dec 22, 2019 | SHORT | VIN | AGND JMP | 12V | 5V
tNames: AUX LOGGING CON2 | AUX LOGGING CON1
bNames: AUX LOGGING CON2 | AUX LOGGING CON1